# Altium PCB DriverControlsLongPCB.PcbDoc
Units mil, origin at the board's own origin, x right, y up, seen from the top; angles counter-clockwise.
Board outline 6335 x 1405 mil, 2 copper layers (Top Layer, Bottom Layer); 104 components, 72 nets, 379 pads, 55 vias.
Unrouted connection lines stored in the file: 103.
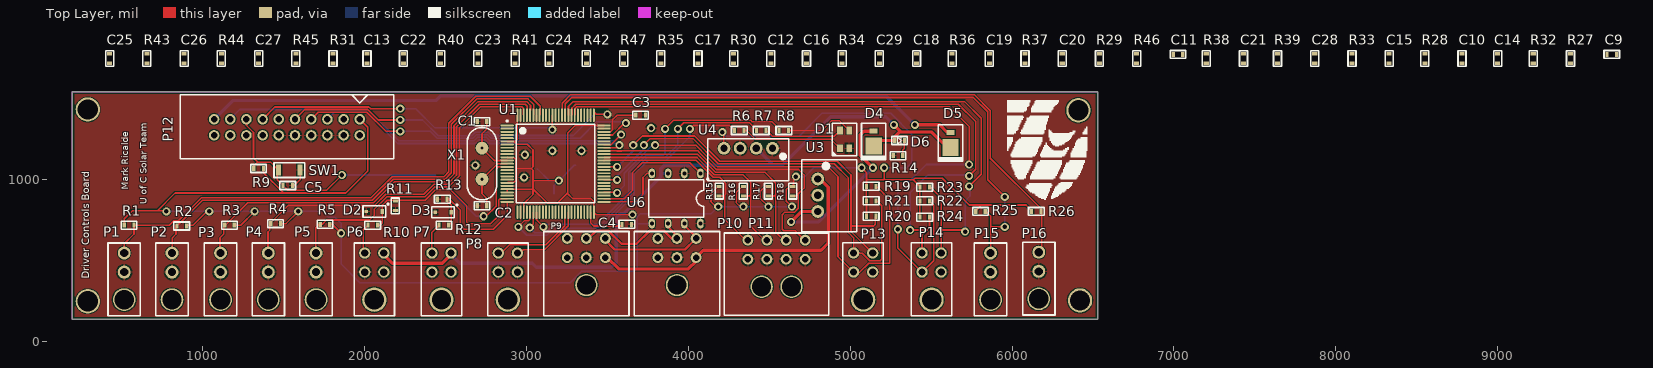
[diagram p0: Top Layer view]
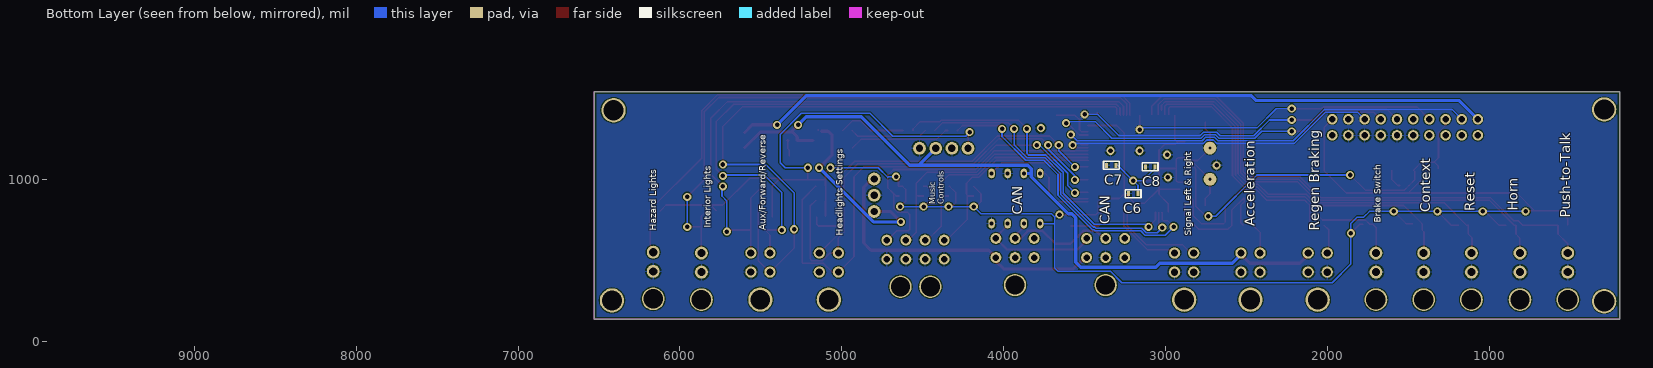
[diagram p1: Bottom Layer view, seen from below]

## Layer stack, top to bottom
Top Solder: solder mask 0.4, Solder Resist, Dk 3.5
Top Layer: signal copper 1.4
Dielectric 1: dielectric 12.6, FR-4, Dk 4.8
Bottom Layer: signal copper 1.4
Bottom Solder: solder mask 0.4, Solder Resist, Dk 3.5

## Board outline
195,1545 6530,1545 6530,140 195,140

## Design rules (kind name [scope] priority, off if disabled: settings)
BoardOutlineClearance [All] p1: gap=15
Clearance [All] p1: gap=6
DiffPairsRouting [All] p1: maxlimit=10 minlimit=10 mostfreqgap=10 toplayer_minwidth=15 toplayer_maxwidth=15 toplayer_prefwidth=15 bottomlayer_minwidth=15 bottomlayer_maxwidth=15 bottomlayer_prefwidth=15 maxuncoupledlength=500
HoleSize [All] p1: absolutevalues=TRUE maxlimit=200 minlimit=13 maxpercent=80.000 minpercent=20.000
MinimumAnnularRing [All] p1: minimumring=7
MinimumSolderMaskSliver [All] p1: minsoldermaskwidth=5
PolygonConnect [All] p1: connectstyle=Relief reliefconductorwidth=10 reliefentries=4 polygonreliefangle="90 Angle" airgapwidth=10
RoutingVias [All] p1: holewidth=28 width=50 viastyle="Through Hole" minholewidth=28 minwidth=50 maxholewidth=28 maxwidth=50
SilkToSilkClearance [All] p1: silktosilkclearance=1
SilkToSolderMaskClearance [IsPad] p1: minsilkscreentomaskgap=3 clearancetoexposedcopper=TRUE
SolderMaskExpansion [All] p1: expansion=4
Width [All] p1: maxlimit=20 minlimit=6 preferedwidth=10
25 further rules are at their usual default settings.

## Classes and differential pairs
component class MCU: C1 C2 C3 C4 C5 D1 R6 R7 R8 R9 SW1 U1 X1
component class Signals: D2 D3 R10 R11 R12 R13
component class Connectors: C9 C10 C11 C12 C13 C14 C15 C16 C17 C18 C19 C20 C21 P2 P3 P4 P5 P6 P7 P8 P9 P10 P11 P12 R1 R2 R3 R4 R5 R15 R16 R17 R18 R27 R28 R29 R30 R31 R32 R33 R34 R35 R36 R37 R38 R39
component class Communications: U6
component class Power: C6 C7 C8 D4 D5 D6 R14 U3 U4
differential pair CAN2: +CAN2_P -CAN2_N

## Components (designator, comment, footprint, x,y, rotation, side; value= is the part's Value field where it differs from the comment)
C1 "SCH_GENERIC_CAPACITOR_0603" PCB_GENERIC_SMD_0603 2725,1360 r0 top
C2 "SCH_GENERIC_CAPACITOR_0603" PCB_GENERIC_SMD_0603 2725,840 r0 top
C3 "SCH_GENERIC_CAPACITOR_0603" PCB_GENERIC_SMD_0603 3705,1400 r180 top
C4 "SCH_GENERIC_CAPACITOR_0603" PCB_GENERIC_SMD_0603 3620,725 r180 top
C5 "SCH_GENERIC_CAPACITOR_0603" PCB_GENERIC_SMD_0603 1525,965 r0 top
C6 "SCH_GENERIC_CAPACITOR_0603" PCB_GENERIC_SMD_0603 3200,915 r180 bottom
C7 "SCH_GENERIC_CAPACITOR_0603" PCB_GENERIC_SMD_0603 3335,1090 r180 bottom
C8 "SCH_GENERIC_CAPACITOR_0603" PCB_GENERIC_SMD_0603 3095,1080 r180 bottom
C9 "SCH_GENERIC_CAPACITOR_0603" PCB_GENERIC_SMD_0603 9705,1775 r0 top
C10 "SCH_GENERIC_CAPACITOR_0603" PCB_GENERIC_SMD_0603 8780,1750 r90 top
C11 "SCH_GENERIC_CAPACITOR_0603" PCB_GENERIC_SMD_0603 7025,1775 r0 top
C12 "SCH_GENERIC_CAPACITOR_0603" PCB_GENERIC_SMD_0603 4510,1750 r90 top
C13 "SCH_GENERIC_CAPACITOR_0603" PCB_GENERIC_SMD_0603 2015,1750 r90 top
C14 "SCH_GENERIC_CAPACITOR_0603" PCB_GENERIC_SMD_0603 9000,1750 r90 top
C15 "SCH_GENERIC_CAPACITOR_0603" PCB_GENERIC_SMD_0603 8330,1750 r90 top
C16 "SCH_GENERIC_CAPACITOR_0603" PCB_GENERIC_SMD_0603 4730,1750 r90 top
C17 "SCH_GENERIC_CAPACITOR_0603" PCB_GENERIC_SMD_0603 4060,1750 r90 top
C18 "SCH_GENERIC_CAPACITOR_0603" PCB_GENERIC_SMD_0603 5410,1750 r90 top
C19 "SCH_GENERIC_CAPACITOR_0603" PCB_GENERIC_SMD_0603 5860,1750 r90 top
C20 "SCH_GENERIC_CAPACITOR_0603" PCB_GENERIC_SMD_0603 6310,1750 r90 top
C21 "SCH_GENERIC_CAPACITOR_0603" PCB_GENERIC_SMD_0603 7430,1750 r90 top
C22 "SCH_GENERIC_CAPACITOR_0603" PCB_GENERIC_SMD_0603 2240,1750 r90 top
C23 "SCH_GENERIC_CAPACITOR_0603" PCB_GENERIC_SMD_0603 2700,1750 r90 top
C24 "SCH_GENERIC_CAPACITOR_0603" PCB_GENERIC_SMD_0603 3140,1750 r90 top
C25 "SCH_GENERIC_CAPACITOR_0603" PCB_GENERIC_SMD_0603 425,1750 r90 top
C26 "SCH_GENERIC_CAPACITOR_0603" PCB_GENERIC_SMD_0603 885,1750 r90 top
C27 "SCH_GENERIC_CAPACITOR_0603" PCB_GENERIC_SMD_0603 1345,1750 r90 top
C28 "SCH_GENERIC_CAPACITOR_0603" PCB_GENERIC_SMD_0603 7870,1750 r90 top
C29 "SCH_GENERIC_CAPACITOR_0603" PCB_GENERIC_SMD_0603 5180,1750 r90 top
D1 "TriColourLED" "TricolourLED - SunLED - DK  1497-1225-2-ND" 4965,1250 r270 top
D2 "Zener Diode" PCBComponent_1 2060,805 r0 top
D3 "Zener Diode" PCBComponent_1 2485,800 r0 top
D4 "Schottky Diode" "ON Semi Schottky Diode - MBRM110LT1G" 5145,1275 r90 top
D5 "Schottky Diode" "ON Semi Schottky Diode - MBRM110LT1G" 5620,1265 r90 top
D6 "RED LED" SMD_0603_LED 5305,1245 r0 top
P1 "SCH_MLX_1X2" PCB_MLX_MICROFIT_1X2 515,340 r0 top
P2 "SCH_MLX_1X2" PCB_MLX_MICROFIT_1X2 810,340 r0 top
P3 "SCH_MLX_1X2" PCB_MLX_MICROFIT_1X2 1110,340 r0 top
P4 "SCH_MLX_1X2" PCB_MLX_MICROFIT_1X2 1405,340 r0 top
P5 "SCH_MLX_1X2" PCB_MLX_MICROFIT_1X2 1700,340 r0 top
P6 "MLX_MICROFIT_2X2" MLX_MICROFIT_2X2 2060,340 r0 top
P7 "MLX_MICROFIT_2X2" MLX_MICROFIT_2X2 2475,340 r0 top
P8 "MLX_MICROFIT_2X2" MLX_MICROFIT_2X2 2885,340 r0 top
P9 "SCH_MLX_MICROFIT_3X2" PCB_MLX_MICROFIT_3X2 3370,350 r0 top
P10 "SCH_MLX_MICROFIT_3X2" PCB_MLX_MICROFIT_3X2 3930,350 r0 top
P11 "SCH_MLX_MICROFIT_4X2" PCB_MLX_MICROFIT_4X2 4545,510 r0 top
P12 "SWD/VCOM Header - J-Link" "Samtec TST-110-01-G-D" 1070,1375 r0 top
P13 "MLX_MICROFIT_2X2" MLX_MICROFIT_2X2 5080,340.45 r0 top
P14 "MLX_MICROFIT_2X2" MLX_MICROFIT_2X2 5502.77,340.45 r0 top
P15 "SCH_MLX_1X2" PCB_MLX_MICROFIT_1X2 5867.23,340 r0 top
P16 "SCH_MLX_1X2" PCB_MLX_MICROFIT_1X2 6165,345 r0 top
R1 "SCH_GENERIC_RESISTOR_0603" PCB_GENERIC_SMD_0603 545,720 r0 top
R2 "SCH_GENERIC_RESISTOR_0603" PCB_GENERIC_SMD_0603 870,715 r180 top
R3 "SCH_GENERIC_RESISTOR_0603" PCB_GENERIC_SMD_0603 1165,720 r180 top
R4 "SCH_GENERIC_RESISTOR_0603" PCB_GENERIC_SMD_0603 1450,730 r180 top
R5 "SCH_GENERIC_RESISTOR_0603" PCB_GENERIC_SMD_0603 1755,725 r180 top
R6 "SCH_GENERIC_RESISTOR_0603" PCB_GENERIC_SMD_0603 4315,1305 r0 top
R7 "SCH_GENERIC_RESISTOR_0603" PCB_GENERIC_SMD_0603 4450,1305 r0 top
R8 "SCH_GENERIC_RESISTOR_0603" PCB_GENERIC_SMD_0603 4590,1305 r0 top
R9 "SCH_GENERIC_RESISTOR_0603" PCB_GENERIC_SMD_0603 1345,1070 r180 top
R10 "SCH_GENERIC_RESISTOR_0603" PCB_GENERIC_SMD_0603 2050,720 r180 top
R11 "SCH_GENERIC_RESISTOR_0603" PCB_GENERIC_SMD_0603 2190,840 r90 top
R12 "SCH_GENERIC_RESISTOR_0603" PCB_GENERIC_SMD_0603 2490,720 r180 top
R13 "SCH_GENERIC_RESISTOR_0603" PCB_GENERIC_SMD_0603 2480,880 r0 top
R14 "SCH_GENERIC_RESISTOR_0603" PCB_GENERIC_SMD_0603 5295,1150 r180 top
R15 "SCH_GENERIC_RESISTOR_0603" PCB_GENERIC_SMD_0603 4190,930 r270 top
R16 "SCH_GENERIC_RESISTOR_0603" PCB_GENERIC_SMD_0603 4340,930 r270 top
R17 "SCH_GENERIC_RESISTOR_0603" PCB_GENERIC_SMD_0603 4495,930 r270 top
R18 "SCH_GENERIC_RESISTOR_0603" PCB_GENERIC_SMD_0603 4645,930 r270 top
R19 "SCH_GENERIC_RESISTOR_0603" PCB_GENERIC_SMD_0603 5130,960 r0 top
R20 "SCH_GENERIC_RESISTOR_0603" PCB_GENERIC_SMD_0603 5130,775 r0 top
R21 "SCH_GENERIC_RESISTOR_0603" PCB_GENERIC_SMD_0603 5130,870 r0 top
R22 "SCH_GENERIC_RESISTOR_0603" PCB_GENERIC_SMD_0603 5460,870 r0 top
R23 "SCH_GENERIC_RESISTOR_0603" PCB_GENERIC_SMD_0603 5460,955 r0 top
R24 "SCH_GENERIC_RESISTOR_0603" PCB_GENERIC_SMD_0603 5460,770 r0 top
R25 "SCH_GENERIC_RESISTOR_0603" PCB_GENERIC_SMD_0603 5805,805 r180 top
R26 "SCH_GENERIC_RESISTOR_0603" PCB_GENERIC_SMD_0603 6150,805 r180 top
R27 "SCH_GENERIC_RESISTOR_0603" PCB_GENERIC_SMD_0603 9450,1750 r90 top
R28 "SCH_GENERIC_RESISTOR_0603" PCB_GENERIC_SMD_0603 8550,1750 r90 top
R29 "SCH_GENERIC_RESISTOR_0603" PCB_GENERIC_SMD_0603 6540,1750 r90 top
R30 "SCH_GENERIC_RESISTOR_0603" PCB_GENERIC_SMD_0603 4280,1750 r90 top
R31 "SCH_GENERIC_RESISTOR_0603" PCB_GENERIC_SMD_0603 1805,1750 r90 top
R32 "SCH_GENERIC_RESISTOR_0603" PCB_GENERIC_SMD_0603 9220,1750 r90 top
R33 "SCH_GENERIC_RESISTOR_0603" PCB_GENERIC_SMD_0603 8100,1750 r90 top
R34 "SCH_GENERIC_RESISTOR_0603" PCB_GENERIC_SMD_0603 4950,1750 r90 top
R35 "SCH_GENERIC_RESISTOR_0603" PCB_GENERIC_SMD_0603 3830,1750 r90 top
R36 "SCH_GENERIC_RESISTOR_0603" PCB_GENERIC_SMD_0603 5630,1750 r90 top
R37 "SCH_GENERIC_RESISTOR_0603" PCB_GENERIC_SMD_0603 6080,1750 r90 top
R38 "SCH_GENERIC_RESISTOR_0603" PCB_GENERIC_SMD_0603 7200,1750 r90 top
R39 "SCH_GENERIC_RESISTOR_0603" PCB_GENERIC_SMD_0603 7640,1750 r90 top
R40 "SCH_GENERIC_RESISTOR_0603" PCB_GENERIC_SMD_0603 2470,1750 r90 top
R41 "SCH_GENERIC_RESISTOR_0603" PCB_GENERIC_SMD_0603 2930,1750 r90 top
R42 "SCH_GENERIC_RESISTOR_0603" PCB_GENERIC_SMD_0603 3370,1750 r90 top
R43 "SCH_GENERIC_RESISTOR_0603" PCB_GENERIC_SMD_0603 655,1750 r90 top
R44 "SCH_GENERIC_RESISTOR_0603" PCB_GENERIC_SMD_0603 1115,1750 r90 top
R45 "SCH_GENERIC_RESISTOR_0603" PCB_GENERIC_SMD_0603 1575,1750 r90 top
R46 "SCH_GENERIC_RESISTOR_0603" PCB_GENERIC_SMD_0603 6770,1750 r90 top
R47 "SCH_GENERIC_RESISTOR_0603" PCB_GENERIC_SMD_0603 3600,1750 r90 top
SW1 "Reset Switch" "Push Button Switch" 1535,1060 r0 top
U1 "STM32F407VGT6" STM-LQFP100_M 3180,1100 r0 top
U3 "R78E-1.0 DC/DC" R78-1.0 4800,905 r270 top
U4 "RECOM RO Series" "RECOM RO Series 1W DCDC" 4520,1195 r180 top
U6 "MCP2562" MCP2562 3925,885 r270 top
X1 "XTAL" CRYSTAL_8MHZ 2725,1100 r270 top

## Footprints (in the part's own frame and the unit in brackets; to place one, negate y for a bottom-side part, rotate by r counter-clockwise, add the part's x,y. Pads: shape width x height; smd on the part's side, far side on the other; paste and mask are expansions set on the pad)
CRYSTAL_8MHZ [mm] "631-1100-ND"
  round 2 hole 0.5: 1(-2.44,0) 2(2.44,0)
  silkscreen extent -5.68,-2.32 5.68,2.32, body extent -5.59,-1.85 5.59,1.85, height 3.6
MCP2562 [mil]
  oval 60x40 hole 25: 1(-155,150) 2(-155,50) 3(-155,-50) 4(-155,-150) 5(155,-150) 6(155,-50) 7(155,50) 8(155,150)
  silkscreen extent -125,-170 115,200, body extent -115,-170 115,170, height 210
MLX_MICROFIT_2X2 [mil]
  round 70 hole 45: 1(59,90) 2(-59,90) 3(59,208) 4(-59,208)
  round 150 hole 120: ""(0,-80)
  silkscreen extent -125,-180 125,270, body extent -200,-185 200,297, height 345
"ON Semi Schottky Diode - MBRM110LT1G" [mil]
  rect 105x100 smd: 1(-65,0)
  rect 30x50 smd: 2(27.5,0)
  silkscreen extent -150,-75 75,75, body extent -115,-65 0,65, height 40
PCB_GENERIC_SMD_0603 [mm]
  rect 0.5x0.8 smd: 1(-0.75,0) 2(0.75,0)
  silkscreen extent -1.22,-0.63 1.22,0.63, body extent -0.75,-0.5 0.75,0.5, height 0.45
PCB_MLX_MICROFIT_1X2 [mil]
  round 80 hole 50: 1(0,90) 2(0,208)
  round 140 hole 120: ""(0,-80)
  silkscreen extent -100,-180 100,270, body extent -141,-186 140,296, height 345
PCB_MLX_MICROFIT_3X2 [mm]
  round 1.7 hole 1.02: 1(3,4.32) 2(0,4.32) 3(-3,4.32) 4(3,7.32) 5(0,7.32) 6(-3,7.32)
  round 3.5 hole 3: ""(0,0)
  silkscreen extent -6.7,-4.8 6.7,8.4, body extent -6.57,-4.65 6.58,7.59, height 8.83
PCB_MLX_MICROFIT_4X2 [mm] "Molex MicroFit 4x2 Connector"
  round 3.5 hole 3: 0(-2.34,-4.32) 0(2.34,-4.32)
  round 1.7 hole 1.02: 1(4.5,0) 2(1.5,0) 3(-1.5,0) 4(-4.5,0) 5(4.5,3) 6(1.5,3) 7(-1.5,3) 8(-4.5,3)
  silkscreen extent -8.23,-8.82 8.2,4.1, body extent -8.07,-8.7 8.08,3.54, height 8.83
PCBComponent_1 [mm]
  rect 0.55x0.75 smd: 1(1.27,0)
  rect 0.55x0.5 smd: 2(-1.27,0)
  silkscreen extent -1.78,-0.89 2.29,1.27, body extent -0.89,-0.64 0.89,0.64, height 0.7
"Push Button Switch" [mm]
  rect 0.8x1.7 smd: 1(-1.7,0) 2(1.7,0)
  silkscreen extent -2.41,-1.14 2.41,1.14, body extent -2.16,-0.89 2.16,0.89, height 1.6
R78-1.0 [mm]
  round 2 hole 1.15: 1(-2.54,0) 2(0,0) 3(2.54,0)
  silkscreen extent -5.59,-2.54 5.72,6.1, body extent -4.44,-1.59 4.45,5.4, height 10.4
"RECOM RO Series 1W DCDC" [mm] "RO-053.3S"
  round 2 hole 1.15: 1(0,0) 2(2.54,0) 3(5.08,0) 4(7.62,0)
  silkscreen extent -2.54,-1.52 10.16,5.08, body extent -2.41,-1.4 10.03,4.95, height 10
"Samtec TST-110-01-G-D" [mil] "TST-110-01-G-D"
  round 65 hole 40: 1(900,0) 2(900,-100) 3(800,0) 4(800,-100) 5(700,0) 6(700,-100) 7(600,0) 8(600,-100) 9(500,0) 10(500,-100) 11(400,0) 12(400,-100) 13(300,0) 14(300,-100) 15(200,0) 16(200,-100) 17(100,0) 18(100,-100) 19(0,0) 20(0,-100)
  silkscreen extent -210,-245 1110,150, body extent -200,-233 1100,132, height 350
SMD_0603_LED [mm]
  rect 0.5x0.8 smd: 1(-0.747,-0.047) 2(0.753,-0.047)
  silkscreen extent -1.22,-0.67 1.23,0.58, body extent -0.75,-0.55 0.75,0.45, height 0.45
STM-LQFP100_M [mm] "Thin QFP, 100-Leads, Body 14x14mm, Pitch 0.5mm, IPC Low Density"
  oval 2.1x0.3 smd: 1(-7.6,6) 2(-7.6,5.5) 3(-7.6,5) 4(-7.6,4.5) 5(-7.6,4) 6(-7.6,3.5) 7(-7.6,3) 8(-7.6,2.5) 9(-7.6,2) 10(-7.6,1.5) 11(-7.6,1) 12(-7.6,0.5) 13(-7.6,0) 14(-7.6,-0.5) 15(-7.6,-1) 16(-7.6,-1.5) 17(-7.6,-2) 18(-7.6,-2.5) 19(-7.6,-3) 20(-7.6,-3.5) 21(-7.6,-4) 22(-7.6,-4.5) 23(-7.6,-5) 24(-7.6,-5.5) 25(-7.6,-6) 51(7.6,-6) 52(7.6,-5.5) 53(7.6,-5) 54(7.6,-4.5) 55(7.6,-4) 56(7.6,-3.5) 57(7.6,-3) 58(7.6,-2.5) 59(7.6,-2) 60(7.6,-1.5) 61(7.6,-1) 62(7.6,-0.5) 63(7.6,0) 64(7.6,0.5) 65(7.6,1) 66(7.6,1.5) 67(7.6,2) 68(7.6,2.5) 69(7.6,3) 70(7.6,3.5) 71(7.6,4) 72(7.6,4.5) 73(7.6,5) 74(7.6,5.5) 75(7.6,6)
  oval 0.3x2.1 smd: 26(-6,-7.6) 27(-5.5,-7.6) 28(-5,-7.6) 29(-4.5,-7.6) 30(-4,-7.6) 31(-3.5,-7.6) 32(-3,-7.6) 33(-2.5,-7.6) 34(-2,-7.6) 35(-1.5,-7.6) 36(-1,-7.6) 37(-0.5,-7.6) 38(0,-7.6) 39(0.5,-7.6) 40(1,-7.6) 41(1.5,-7.6) 42(2,-7.6) 43(2.5,-7.6) 44(3,-7.6) 45(3.5,-7.6) 46(4,-7.6) 47(4.5,-7.6) 48(5,-7.6) 49(5.5,-7.6) 50(6,-7.6) 76(6,7.6) 77(5.5,7.6) 78(5,7.6) 79(4.5,7.6) 80(4,7.6) 81(3.5,7.6) 82(3,7.6) 83(2.5,7.6) 84(2,7.6) 85(1.5,7.6) 86(1,7.6) 87(0.5,7.6) 88(0,7.6) 89(-0.5,7.6) 90(-1,7.6) 91(-1.5,7.6) 92(-2,7.6) 93(-2.5,7.6) 94(-3,7.6) 95(-3.5,7.6) 96(-4,7.6) 97(-4.5,7.6) 98(-5,7.6) 99(-5.5,7.6) 100(-6,7.6)
  silkscreen extent -7.72,-6.15 6.15,6.82, body extent -7,-7 7,7, height 1.6
"TricolourLED - SunLED - DK  1497-1225-2-ND" [mm]
  rect 1.2x0.9 smd: 1(1.4,-0.725) 2(-1.4,-0.725) 3(-1.4,0.725) 4(1.4,0.725)
  silkscreen extent -2.54,-1.91 2.54,1.91, body extent -1.84,-1.52 1.84,1.52, height 1.9

## Part data
C1 C2 C3 C4 C5 C6 C7 C8 C9 C10 C11 C12 C13 C14 C15 C16 C17 C18 C19 C20 C21 C22 C23 C24 C25 C26 C27 C28 C29: "Generic SMD capacitor 0603"
D2 D3 D4 D5: library part "ON Semi Schottky Diode - MBRM110LT1G"
D6: library part SMD_0603_LED
P11: "Molex Microfit Connector 4x2"
P12: library part "SWD/VCOM Header"
R1 R2 R3 R4 R5 R6 R7 R8 R9 R10 R11 R12 R13 R14 R15 R16 R17 R18 R19 R20 R21 R22 R23 R24 R25 R26 R27 R28 R29 R30 R31 R32 R33 R34 R35 R36 R37 R38 R39 R40 R41 R42 R43 R44 R45 R46 R47: "Generic SMD resistor 0603"
SW1: library part PushButtonSwitch
U1: "ARM Cortex-M4 32-bit MCU+FPU, 210 DMIPS, 1024 kB Flash, 192 kB Internal RAM, 82 I/Os, 100-pin LQFP, -40 to 85 degC, Tray"
U3: library part R78E-1.0
U4: library part "RECOM RO Series DCDC Converter"
X1: library part Crystal

## Free pads (board coordinates)
  round 150 hole 125: ""(290,250) ""(290,1435) ""(6410,1430) ""(6420,255)

## Via types
v1: diameter 50, hole 28, Top Layer to Bottom Layer, 55 vias

## Nets (pads, with @x,y where several pads share a name; then routed paths per layer and width w, separated by ;. In a path a pad name is that pad's centre, name@x,y a point inside that pad or via, vN(x,y) a via of type N, cw(c..) or ccw(c..) an arc to the next point about the centre after c; other vN are vias at no path point)
"3.3 V": C6.2 C7.2 C8.2 P12.1 R9.1 R15.1 R16.1 R17.1 R18.1 R19.1 R20.1 R21.1 R22.1 R23.1 R24.1 R25.2 R26.2 R27.1 R28.1 R29.1 R30.1 R31.1 U1.6 U1.11 U1.19 U1.21 U1.22 U1.28 U1.50 U1.75 U1.100 U4.4 U6.5 | length 15548.3
  Top Layer w10: 515.47,720 515.47,759.53 565.94,810 720,810 ; v1@775,810 775,825 760,810 720,810 ; 894.53,720 940,720 v1@1040,820 ; 1189.53,720 1235,720 v1(1320,805) ; R9.1 1374.53,1044.8 1500.33,919 ; 1474.53,730 1515,730 v1(1590,805) ; 1779.53,725 1800,725 v1(1855,670) ; P12.1 2020,1325 2020,1055 1884,919 1500.33,919 ; U1.22 U1.21 ; U1.11 2883.57,1136.59 2923.22,1136.59 2933.13,1126.69 2933.13,1070 ; U1.19@2883.57,984.67 2923.22,984.67 2933.13,994.57 2933.13,1070 ; U1.21@2910,942.52 3042.48,942.52 3130,855 3190,855 3255,920 ; U1.100 2943.78,1248.78 2932.8,1237.8 U1.6 2883.57,1235.02 2923.22,1235.02 2938.24,1220 3005,1220 3040,1185 3040,1080 3030,1070 ; U1.28 2983.15,853.15 3040,910 3040,995 ; v1(3200,995) 3040,995 ; U1.75 3301.22,1336.22 3255,1290 3255,920 ; v1(3655,785) 3432.01,785 U1.50 3416.22,866.23 3397.45,885 3285,885 3255,915 3255,920 ; v1(4185,835) 4170,835 4140,865 4140,914.53 R15.1@4185,959.53 ; U4.4 v1@4220,1285 ; v1(4340,835) 4320,835 4295,860 4295,920 4334.53,959.53 R16.1 ; v1(4495,835) 4445,885 4445,930 4474.53,959.53 R17.1 ; v1(4640,835) 4610,865 4605,865 4605,940 4624.53,959.53 4650,959.53 4650,1005 v1(4665,1020) ; v1@5082.97,1062.03 5100.47,1044.53 5100.47,1000 ; R19.1@5100,959.53 5100,870.47 R21.1 R20.1 ; R19.1 5100.47,1000 ; v1(5210,1075) 5210,1000 ; R24.1 R22.1 5430.47,960 5390.47,1000 ; R25.2@5775.47,810 5810,844.53 ; R26.2@6125.47,805 6085.94,844.53 5735.47,844.53 5569.53,1010.47 5400.94,1010.47 5390.47,1000 ; 720,810 829,919 1500.33,919 ; 2933.13,1070 3030,1070 ; 3030,1070 3040,1060 3040,995 ; 5100.47,1000 5210,1000 ; 5210,1000 5390.47,1000
  Bottom Layer w10: v1(775,805) v1(1040,805) v1(1320,805) v1(1590,805) 1740,805 1775,770 1815,770 1855,730 v1(1855,670) 1855,480 1970,365 3270,365 3340,435 3665,435 3685,455 3685,730 ; C8.2@3067.74,1067.26 3140,995 v1(3200,995) 3170.47,965.47 C6.2 ; v1@3205,999.53 3295.47,1090 C7.2 ; v1(3655,785) 3670,785 3685,770 ; U6.5 3685,730 ; v1(4210,1295) 4235,1270 4685,1270 4826,1411 5249.91,1411 5380,1280.91 5380,1105 5350,1075 v1(5210,1075) ; v1(4640,835) v1(4495,835) v1(4340,835) v1(4185,835) 4140,790 3705,790 3685,770 ; v1(4665,1020) 4710,1020 4715,1015 4775,1075 v1(5070,1075) ; 3685,730 3685,770
"5 V": D4.1 D5.1 D6.1 P6.3 P7.3 U4.2 U6.3 | length 4575.5
  Top Layer w20: P6.3@2119,538 2172,485 2480,485 P7.3@2533,538 ; D4.1@5178.15,1243.15 D6.1 5275.59,1265.59 5310,1300 v1(5270,1340) ; 5305,1295 5505,1295 D5.1@5600,1200
  Bottom Layer w20: P7.3@2534,538 2587,485 3035,485 3060,460 3525,460 3555,490 3555,765.05 3579.95,790 3600,790 3830,1020 3830,1040 ; U6.3 3830,1040 ; U4.2 4525,1090 ; v1(5270,1340) 5220,1390 4880,1390 4580,1090 4525,1090 ; 3830,1040 3830,1070 3850,1090 4525,1090
"5V - DCDC": D4.2 U3.3 | length 1153.2
  Top Layer w10: D4.2 D4.2@5145,1311
  Top Layer w20: v1(4635,740) 4700,805 U3.3 ; D4.2@5125.56,1300 5085,1300 5060,1275 5060,1155 v1(5140,1075)
  Bottom Layer w20: v1(4635,740) 4805,740 v1(5140,1075)
"5V - DEBUG": D5.2 P12.19 | length 4684.3
  Top Layer w20: v1(5400,1340) 5552.5,1340 D5.2@5600,1292.5
  Bottom Layer w20: P12.19 1185,1490 2440,1490 2470,1520 5220,1520 v1(5400,1340)
"12 V": P9.1 P10.1 U3.1 | length 1920.8
  Top Layer w20: P9.1 3499.92,520.08 3570,450 4000,450 4048.11,498.11 P10.1 4093.03,565 4820,565 4865,610 4865,955 4815,1005 U3.1@4795,1005
"ACCELERATION 1": R12.2 R33.1 | length 200.4
  Top Layer w10: 2416,538 2416,675.53 R12.2
"ACCELERATION 2": D3.1 R12.1 R13.2 U1.25 | length 805.8
  Top Layer w10: R12.1 2535,735.47 D3.1 2535,845 2514.53,865.47 2514.53,890 2590,814.53 2590,720 2615,695 2795,695 2880.79,780.79 U1.25
AUX: R45.2 U1.83 | length 3935.9
  Top Layer w10: U1.83 3281.2,1401.99 3281.2,1444.59 3304.17,1467.55 5667.45,1467.55 5775,1360 5775,1065 v1(5735,1025) ; v1(5370,690) 5475,690 ; 5443.77,547.05 5443.77,658.77 5475,690 ; 5489.53,770 5490,769.53 5490,705 5475,690
  Bottom Layer w10: v1(5370,690) 5370,920 5480,1030 5730,1030 v1(5735,1025)
"BLUE PUSHBUTTON": U1.23
BLUE_LED: R8.1 U1.32 | length 2026.8
  Top Layer w10: U1.32 3061.89,753.11 v1(3105,710) ; v1(3856,1315) 3909,1368 4385.1,1368 4393.1,1360 4515,1360 4560.47,1314.53 R8.1
  Bottom Layer w10: v1(3105,710) 3120,725 3440,725 3632.37,917.37 3632.37,1046.47 3739.65,1153.75 3846.37,1153.75 3856,1163.37 v1@3856,1309
"BRAKE SWITCH": R5.2 U1.98 | length 1983.8
  Top Layer w10: 1698.83,549.17 1698.83,703.36 1720.47,725 1738.38,725 1765.13,751.75 2030.43,751.75 2058.69,780 2058.69,816.31 2137.74,895.37 2372.74,895.37 2433.37,956 2516.51,956 2586,1025.49 2586,1321 2716.55,1451.55 2970.47,1451.55 2980.37,1441.65 U1.98@2980.37,1401.99
CAN2_N: P9.5 P10.5 U6.6 | length 752.3
  Top Layer w15: P9.5@3378.41,646.59 3385,640 3430.15,685.15 3507.56,685.15 3587.72,605 3680,605 3760,685 3792.28,685 3792.44,685.15 3831.34,685.15 3831.5,685 3850,685 P10.5@3896.81,638.19 ; U6.6 3875,710 3930,655 P10.5 3921.81,638.19 P10.5@3919.09,640.91
CAN2_P: P9.4 P10.4 U6.7 | length 752.4
  Top Layer w15: P9.4 3488.11,626.89 3545,570 3979.92,570 P10.4@4040,630.08 ; U6.7@3975,711.3 U6.7 3975,720 4048.11,646.89 P10.4
CAN2_RX: U1.51 U6.4 | length 430.3
  Top Layer w10: U1.51 3673.78,863.78 3720,910 3720,1015 3745,1040 U6.4
CAN2_TX: U1.52 U6.1 | length 779.7
  Top Layer w10: U1.52 3603.46,883.46 3655,935 3655,1045 3716,1106 4009,1106 U6.1
CONTEXT: R4.2 U1.97 | length 2314.7
  Top Layer w10: 1402.87,548.88 1402.87,677.87 1415,690 1415,729.53 1415.47,730 1527.47,842 2061.75,842 2131.12,911.37 2366.12,911.37 2426.75,972 2509.88,972 2568,1030.12 2568,1328 2707.55,1467.55 2992.45,1467.55 3005,1455 U1.97@3005,1401.38
FORWARD: R44.1 U1.84 | length 4000.1
  Top Layer w10: U1.84@3260,1400.47 3260,1455 3288.55,1483.55 5706.45,1483.55 5810,1380 5810,1035 v1(5735,960) ; 5489.53,960 5561.77,887.76 5561.77,690 ; 5561.77,547.05 5561.77,690 ; v1(5710,680) 5700,690 5561.77,690
  Bottom Layer w10: v1(5710,680) 5710,870 5740,900 5740,955 v1(5735,960)
GND: C1.1 C2.1 C3.1 C4.1 C5.2 C6.1 C7.1 C8.1 C9.1 C10.1 C11.1 C12.1 C14.1 C15.1 C16.1 C17.1 C18.1 C19.1 C20.1 C21.1 C22.1 C23.1 C24.1 C25.1 C26.1 C27.1 C28.2 C29.2 D1.4 D2.2 D3.2 P1.1 P2.1 P3.1 P4.1 P5.1 P6.1 P6.2 P7.1 P7.2 P8.1 P8.2 P9.2 P10.2 P11.1 P11.2 P11.3 P11.4 P12.4 P12.6 P12.8 P12.10 P12.12 P14.1 P15.1 P16.1 R11.1 R13.1 R14.2 SW1.2 U1.10 U1.20 U1.27 U1.74 U1.94 U1.99 U3.2 U4.1 U4.3 U6.2 U6.8 | length 120.8
  Top Layer w10: C5.2 1565,965 1601.93,1001.93 SW1.2
  other v1: 2985,1015 2685,1090 2990,1155 3160,1180 3340,1180 3770,1320
GREEN_LED: R7.1 U1.31 | length 1957.8
  Top Layer w10: v1(3020,705) 3042.2,727.2 U1.31 ; v1(3935,1315) 3972,1352 4378.47,1352 R7.1@4425.47,1305
  Bottom Layer w10: v1(3020,705) 3051,674 3119.91,674 3146.91,701 3428.37,701 3436.37,709 3446.63,709 3648.37,910.75 3648.37,1039.84 3746.28,1137.75 3857.75,1137.75 3935,1215 v1(3935,1315)
"HAZARD LIGHTS": R47.1 U1.86 | length 3795.8
  Top Layer w10: U1.86 3221,1400.84 3221,1473.63 3272.37,1525 5767.63,1525 5866,1426.63 5866,1134 6184.53,815.47 6184.53,805 6184.53,572.53 6165,553
"HEADLIGHTS HIGH": R40.1 U1.54 | length 3081.5
  Top Layer w10: U1.54 v1@3557.17,922.83 ; v1(3795,1215) 4045.91,1215 4081,1179.91 4081,1179 4180,1080 4865,1080 4925,1020 4925,525.05 5021,429.05 5058.09,429.05 5114.03,485 5245.05,485 5245.05,877.45 5162.5,960 5159.53,960
  Bottom Layer w10: v1(3560,920) 3605,965 3605,1041.72 3778.28,1215 v1(3795,1215)
"HEADLIGHTS LOW": R41.1 U1.62 | length 2478
  Top Layer w10: U1.62 v1@3559.68,1080.32 ; v1(3660,1215) 3716,1271 4039,1271 4195,1115 4920,1115 5005,1030 5005,715 ; 5139,547.05 5005,681.05 5005,715 ; 5155,770.47 5155,725 5145,715 5005,715
  Bottom Layer w10: v1@3575,1080 v1(3560,1080) 3660,1180 v1(3660,1215)
"HEADLIGHTS OFF": R42.1 U1.58 | length 2795.2
  Top Layer w10: U1.58 v1@3558.43,1001.57 ; v1(3725,1215) 3765,1255 4028.54,1255 4184.54,1099 4901,1099 4989,1011 4989,674.43 5021,642.43 5021,547.05 5073.95,547.05 5119.95,501.05 5185,501.05 5195,511.05 5195,839.53 5164.53,870 5159.53,870
  Bottom Layer w10: v1(3560,1000) 3560,1025 3725,1190 v1(3725,1215)
HORN: R2.2 U1.95 | length 2977.7
  Top Layer w10: 810.96,538.29 810.96,640.96 835,665 835,719.53 835.47,720 845,720 999,874 2046.63,874 2176.63,1004 2496.63,1004 2536,1043.37 2536,1343.37 2692.63,1500 3010,1500 3045,1465 3045,1441.66 U1.95@3044.98,1401.99
"INTERIOR LIGHTS": R46.1 U1.85 | length 3851
  Top Layer w10: U1.85 3240,1400.16 3240,1470 3279,1509 5761,1509 5850,1420 5850,1000 v1(5955,895) ; 5834.53,810 5867.23,777.29 5867.23,710 ; 5867.23,548 5867.23,710 ; v1(5955,710) 5867.23,710
  Bottom Layer w10: v1(5955,710) v1(5955,895)
"LAST SONG": R39.1 U1.67 | length 1937.9
  Top Layer w10: U1.67 3558.77,1178.74 3559.3,1178.21 3589.12,1178.21 3589.65,1178.74 4059.54,1178.74 4065,1173.28 4065,1172.37 4173.37,1064 4681,1064 4715,1030 4715,950 4680,915 ; 4645,900.47 4665.47,900.47 4680,915 ; 4722.17,623.11 4660.28,685 4590,685 4580,695 4580,785 4594,799 4654.91,799 4680,824.09 4680,915
NetC2_2: C2.2 U1.13 X1.2 | length 371.7
  Top Layer w10: C2.2 2754.53,885.47 2725,915 X1.2 2821.06,1100 U1.13
NetC3_2: C3.2 U1.73 | length 276.4
  Top Layer w10: U1.73 3518.87,1296.85 3531.55,1309.53 3531.55,1373.45 3533.45,1373.45 3560,1400 C3.2
NetC4_2: C4.2 U1.49 | length 263.9
  Top Layer w10: U1.49 3396.54,733.46 3415,715 C4.2@3585.47,715
NetC9_2: C9.2 P1.2 R1.1
NetC10_2: C10.2 P2.2 R2.1
NetC11_2: C11.2 P3.2 R3.1
NetC12_2: C12.2 P4.2 R4.1
NetC13_2: C13.2 P5.2 R5.1
NetC14_2: C14.2 P6.4 R32.2
NetC15_2: C15.2 P7.4 R33.2
NetC16_2: C16.2 P8.3 R34.1
NetC17_2: C17.2 P8.4 R35.2
NetC18_2: C18.2 P11.8 R15.2 R36.2
NetC19_2: C19.2 P11.7 R16.2 R37.2
NetC20_2: C20.2 P11.6 R17.2 R38.2
NetC21_2: C21.2 P11.5 R18.2 R39.2
NetC22_2: C22.2 P13.2 R19.2 R40.2
NetC23_2: C23.2 P13.3 R20.2 R41.2
NetC24_2: C24.2 P13.4 R21.2 R42.2
NetC25_2: C25.2 P14.2 R22.2 R43.1
NetC26_2: C26.2 P14.3 R23.2 R44.2
NetC27_2: C27.2 P14.4 R24.2 R45.1
NetC28_1: C28.1 P15.2 R25.1 R46.2
NetC29_1: C29.1 P16.2 R26.1 R47.2
NetD1_1: D1.1 R6.2 | length 637.5
  Top Layer w10: R6.2 4360,1305 4415,1250 4881.34,1250 D1.1
NetD1_2: D1.2 R7.2 | length 481
  Top Layer w10: R7.2@4484.53,1305 4519.53,1270 4901.34,1270 D1.2
NetD1_3: D1.3 R8.2 | length 423.7
  Top Layer w10: R8.2 4825,1305 4885,1365 4933.66,1365 D1.3
NetD6_2: D6.2 R14.1 | length 102.6
  Top Layer w10: R14.1@5324.53,1145 5324.53,1184.53 5335,1195 D6.2@5335,1242.8
  Top Layer w20: D6.2 D6.2@5335,1242.8
"NEXT SONG": R38.1 U1.66 | length 1577.3
  Top Layer w10: U1.66 3480.27,1158 4056.75,1158 4166.75,1048 4472,1048 4540,980 4540,910 ; 4495,900.47 4530.47,900.47 4540,910 ; 4604.06,613.11 4540,677.17 4540,910
NRST: C5.1 P12.15 R9.2 SW1.1 U1.14 | length 2408.7
  Top Layer w10: P12.15 1270,1336.52 1313.5,1293.02 1313.5,1136.5 1340,1110 ; R9.2 1315.47,1085.47 1340,1110 ; SW1.1@1460.47,1052.4 1460.47,1000 C5.1 1525.47,935 1765,935 v1(1860,1030) v1@1870,1030 ; SW1.1 1418.07,1110 1340,1110 ; v1(2735,775) 2750,775 2812.45,837.45 2812.45,1067.45 2825.32,1080.32 U1.14
  Bottom Layer w10: v1(1860,1030) 2435,1030 2690,775 v1(2735,775)
PUSH-TO-TALK: R1.2 U1.93 | length 3300.6
  Top Layer w10: 515,538 515,605 575,665 575,719.53 793.85,719.53 821.07,746.75 849.12,746.75 992.37,890 2040,890 2170,1020 2490,1020 2520,1050 2520,1350 2686,1516 3024,1516 3085,1455 3085,1442.29 3084.35,1441.65 U1.93@3084.35,1401.99
RED_LED: R6.1 U1.30 | length 1884.7
  Top Layer w10: v1(2950,710) 2988.45,748.45 3013.45,748.45 3019.74,754.74 3019.74,798.01 U1.30 ; v1(4010,1315) 4031,1336 4254.47,1336 R6.1
  Bottom Layer w10: v1(2950,710) 3002,658 3126.54,658 3153.54,685 3435,685 3443,693 3453.25,693 3664.37,904.12 3664.37,1033.21 3752.9,1121.75 3864.37,1121.75 4010,1267.37 v1@4010,1310
"REGEN BRAKING 1": R10.2 R32.1 | length 197.7
  Top Layer w10: 2001,538 1991.79,547.21 1991.79,691.32 R10.2
"REGEN BRAKING 2": D2.1 R10.1 R11.2 U1.24 | length 1222.5
  Top Layer w10: R10.1 2095,720 2110,735 D2.1 2110,845 2139.53,874.53 2220,874.53 2374.53,874.53 2440,940 2530,940 2630,840 2630,740 2640,730 2780,730 2828.45,778.45 2828.45,875 2836.91,883.46 U1.24
RESET: R3.2 U1.96 | length 2616.2
  Top Layer w10: 1106.92,538.58 1106.92,641.92 1130,665 1130,719.53 1130.47,720 1140,720 1278,858 2055.12,858 2185.12,988 2503.25,988 2552,1036.75 2552,1334.63 2700.92,1483.55 3001.45,1483.55 3025,1460 U1.96@3025,1430
REVERSE: R43.2 U1.82 | length 4309.9
  Top Layer w10: U1.82@3300.89,1401.99 3300.89,1441.65 3310.79,1451.55 5613.45,1451.55 5735,1330 v1(5735,1095) ; v1(5295,695) 5295,577.82 5443.77,429.05 5515.77,501.05 5515.77,843.76 5489.53,870
  Bottom Layer w10: v1(5295,695) 5295,920 5470,1095 v1(5735,1095)
SCLK: C1.2 U1.12 X1.1 | length 363.1
  Top Layer w10: C1.2 2754.53,1314.53 2725,1285 X1.1 2801.06,1120 U1.12@2880.47,1120
"SIGNAL LIGHTS LEFT": R34.2 U1.42 | length 468.2
  Top Layer w10: 2949,538 2980,569 3111.63,569 3258.74,716.11 U1.42
"SIGNAL LIGHTS RIGHT": R35.1 U1.41 | length 544
  Top Layer w10: 2843.5,548.5 2895,600 3120,600 3236.28,716.28 U1.41@3236.28,798.01
SWCLK: P12.9 U1.76 | length 2185.2
  Top Layer w10: P12.9 1629.5,1434.5 2020.13,1434.5 2084.63,1370 v1(2220,1370) ; U1.76@3415,1407.99 3422.01,1415 3432.01,1405 v1(3500,1405)
  Bottom Layer w10: v1(2220,1370) 2358,1370 2455,1273 2662.82,1273 2684.25,1294.43 2765.75,1294.43 2786.18,1274 3289,1274 3420,1405 v1(3500,1405)
SWDIO: P12.7 U1.72 | length 2245.4
  Top Layer w10: P12.7 1713.5,1418.5 2013.5,1418.5 2132,1300 v1(2220,1300) ; U1.72 3531.25,1277.17 3604.66,1350.57 v1(3614.17,1350.57)
  Bottom Layer w10: v1(2220,1300) 2405.37,1300 2448.37,1257 2669.45,1257 2690.88,1278.43 2759.12,1278.43 2780.55,1257 3332,1257 3435,1360 v1@3604.75,1360
SWO: P12.13 U1.89 | length 1968.8
  Top Layer w10: P12.13 1445.5,1450.5 2026.75,1450.5 2037.25,1440 v1(2220,1440) ; v1(3160,1310) 3160.32,1310.32 U1.89
  Bottom Layer w10: v1(2220,1440) 2316,1440 2435,1321 3149,1321 v1(3160,1310)
UART1_RX: P12.17 U1.69 | length 2685.1
  Top Layer w10: U1.69 3523.11,1218.11 v1(3585,1280)
  Bottom Layer w10: P12.17 1229.5,1434.5 2018.13,1434.5 2211.63,1241 2676.08,1241 2697.51,1262.43 2752.49,1262.43 2773.92,1241 3546,1241 v1(3585,1280)
UART1_TX: P12.5 U1.68 | length 2058.8
  Top Layer w10: U1.68 3563.43,1198.43 3574.21,1209.21 v1(3574.21,1214.21) v1@3585,1225
  Bottom Layer w10: P12.5 1813.5,1418.5 2011.5,1418.5 2205,1225 2682.7,1225 2704.14,1246.43 2745.86,1246.43 2767.3,1225 3568.43,1225 3574.21,1230.79 v1(3574.21,1214.21)
"VOLUME DOWN": R36.1 U1.64 | length 1280.7
  Top Layer w10: U1.64 3481.53,1122 4047.49,1122 4153.49,1016 4194,1016 4230,980 4230,910 4225.24,905.24 ; 4185,900.47 4220.47,900.47 4225.24,905.24 ; 4367.83,613.11 4225.24,755.71 4225.24,905.24
"VOLUME UP": R37.1 U1.65 | length 1430.6
  Top Layer w10: U1.65@3480.49,1138.09 3480.58,1138 4054.12,1138 4160.12,1032 4338,1032 4385,985 4385,910 ; 4340,900.47 4375.47,900.47 4385,910 ; 4485.94,613.11 4385,714.06 4385,910
pads on no net: C13.1 P1. P2. P3. P4. P5. P6. P7. P8. P9. P9.3 P9.6 P10. P10.3 P10.6 P11.0 P12.2 P12.3 P12.11 P12.14 P12.16 P12.18 P12.20 P13. P13.1 P14. P15. P16. R27.2 R28.2 R29.2 R30.2 R31.2 U1.1 U1.2 U1.3 U1.4 U1.5 U1.7 U1.8 U1.9 U1.15 U1.16 U1.17 U1.18 U1.26 U1.29 U1.33 U1.34 U1.35 U1.36 U1.37 U1.38 U1.39 U1.40 U1.43 U1.44 U1.45 U1.46 U1.47 U1.48 U1.53 U1.55 U1.56 U1.57 U1.59 U1.60 U1.61 U1.63 U1.70 U1.71 U1.77 U1.78 U1.79 U1.80 U1.81 U1.87 U1.88 U1.90 U1.91 U1.92

## Polygon pours and split planes (outlines as drawn)
GND on Top Layer "GND-Top" (solid, pour order 8): 195,1545 6530,1545 6530,140 195,140
GND on Bottom Layer "GND-Bot" (solid, pour order 10): 195,1545 6530,1545 6530,140 195,140

## Keep-outs
Keep-Out Layer:
  the board outline again, w5

## Silkscreen, mask and mechanical layers (free items; w line width, h text height)
Top Overlay:
  drawing of 15 lines, arcs and shapes, not listed
  text "Mark Ricalde" at 540,940 h40 r90
  text "U of C Solar Team" at 655,850 h40 r90
  text "Driver Controls Board" at 300,390 h45 r90
Bottom Overlay:
  text "Music / Controls" at 4370,850 h35 r270
  text "Horn" at 825,810 h60 r270
  text "Reset" at 1090,805 h60 r270
  text "Context" at 1365,800 h60 r270
  text "CAN" at 3885,785 h60 r270
  text "Push-to-Talk" at 500,765 h60 r270
  text "Brake Switch" at 1670,735 h40 r270
  text "CAN" at 3345,725 h60 r270
  text "Acceleration" at 2450,715 h60 r270
  text "Interior Lights" at 5810,705 h40 r270
  text "Aux/Forward/Reverse" at 5470,690 h40 r270
  text "Regen Braking" at 2050,685 h60 r270
  text "Hazard Lights" at 6145,685 h40 r270
  text "Signal Left & Right" at 2840,655 h40 r270
  text "Headlights Settings" at 4995,655 h40 r270